# Altium PCB Accessory_Breakout_X1.PcbDoc
Units mm, origin at the board's own origin, x right, y up, seen from the top; angles counter-clockwise.
Board outline 76.36 x 81.86 mm, 2 copper layers (Top Layer, Bottom Layer), stack 1.571 mm thick; 13 components, 26 nets, 122 pads, 412 vias.
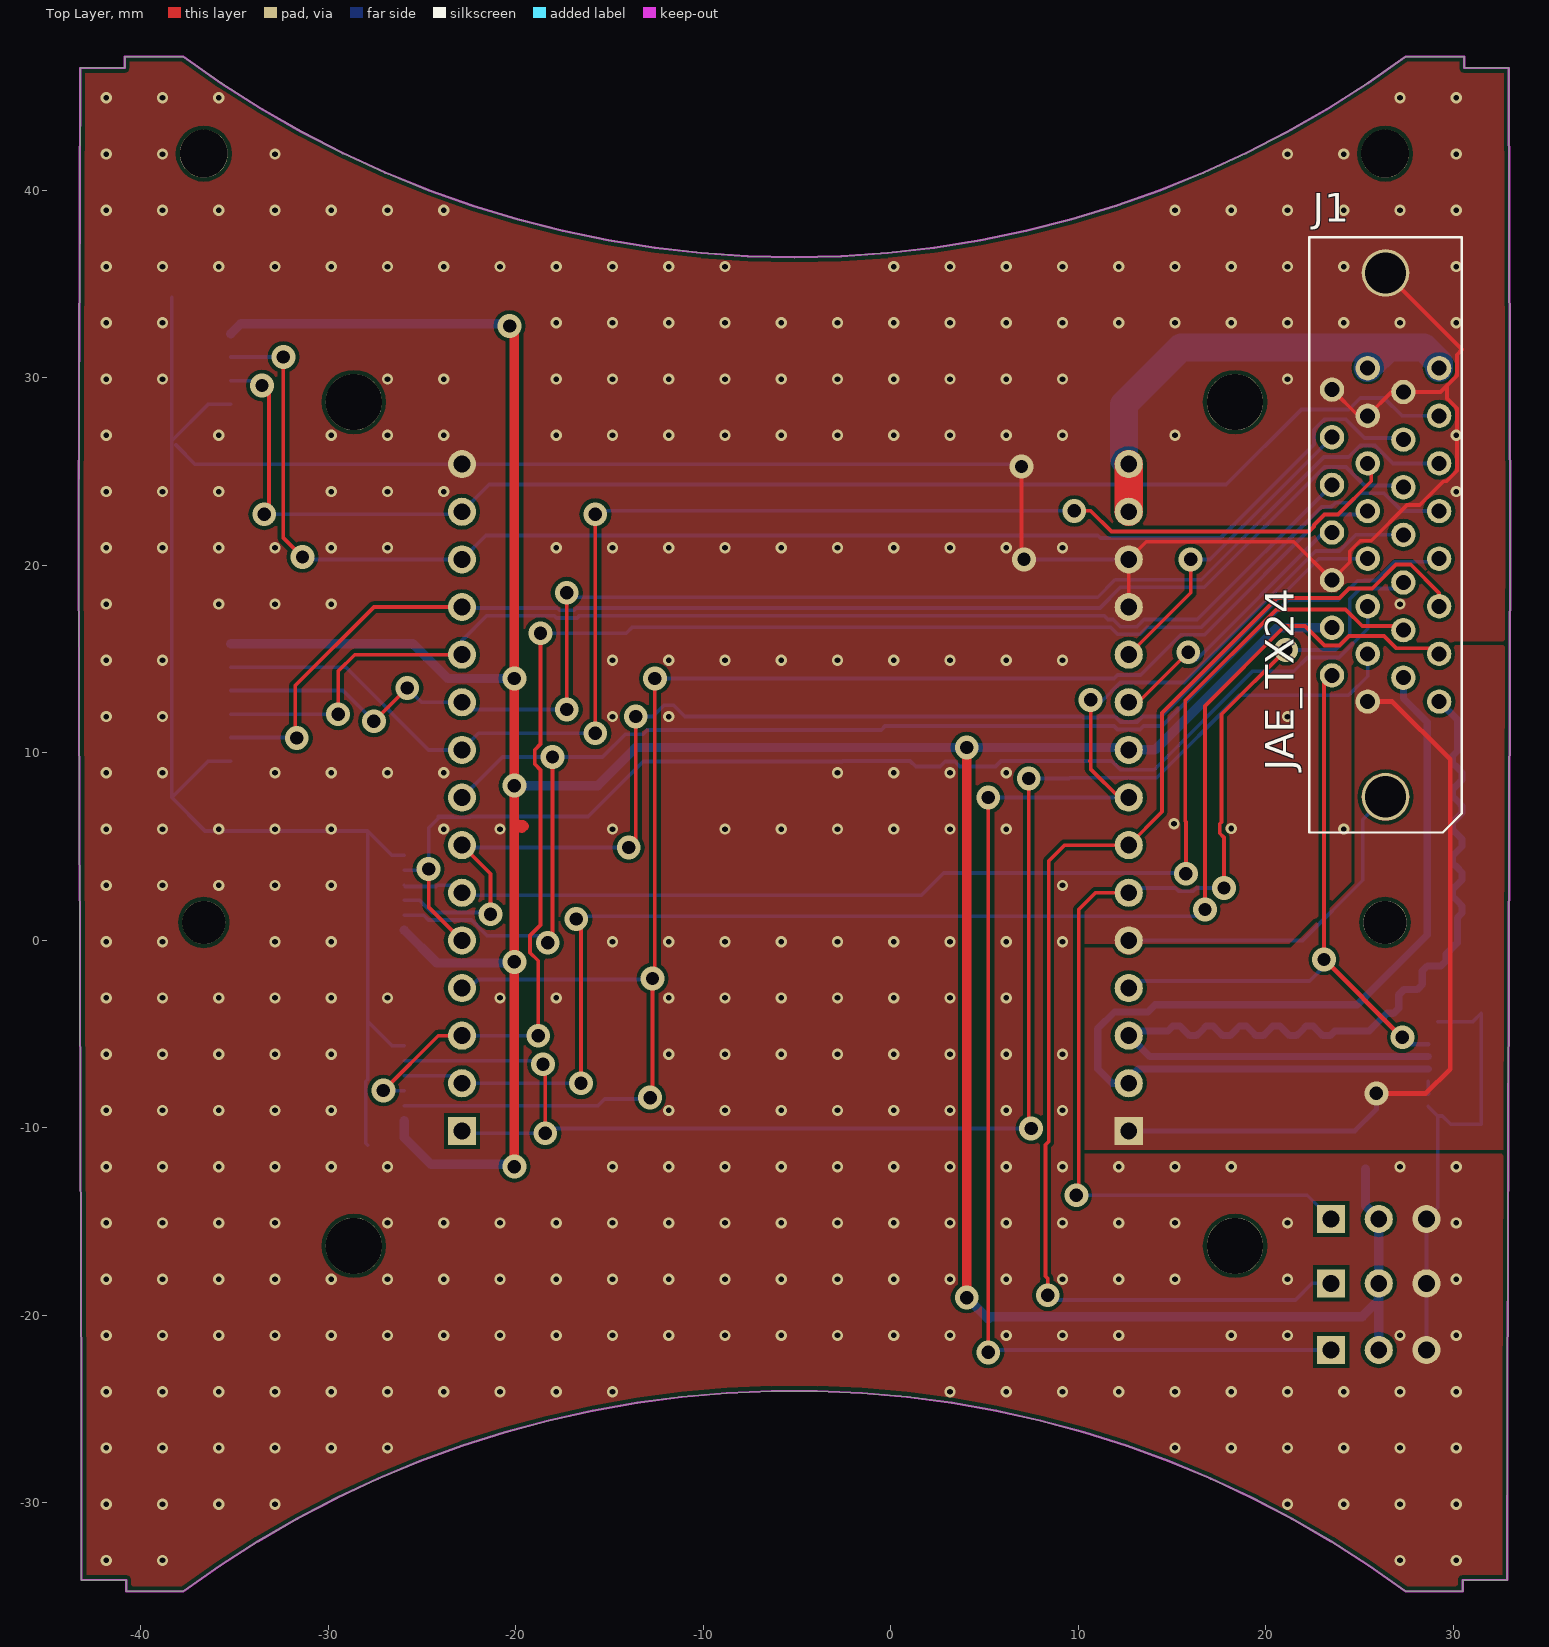
[diagram p0: Top Layer view]
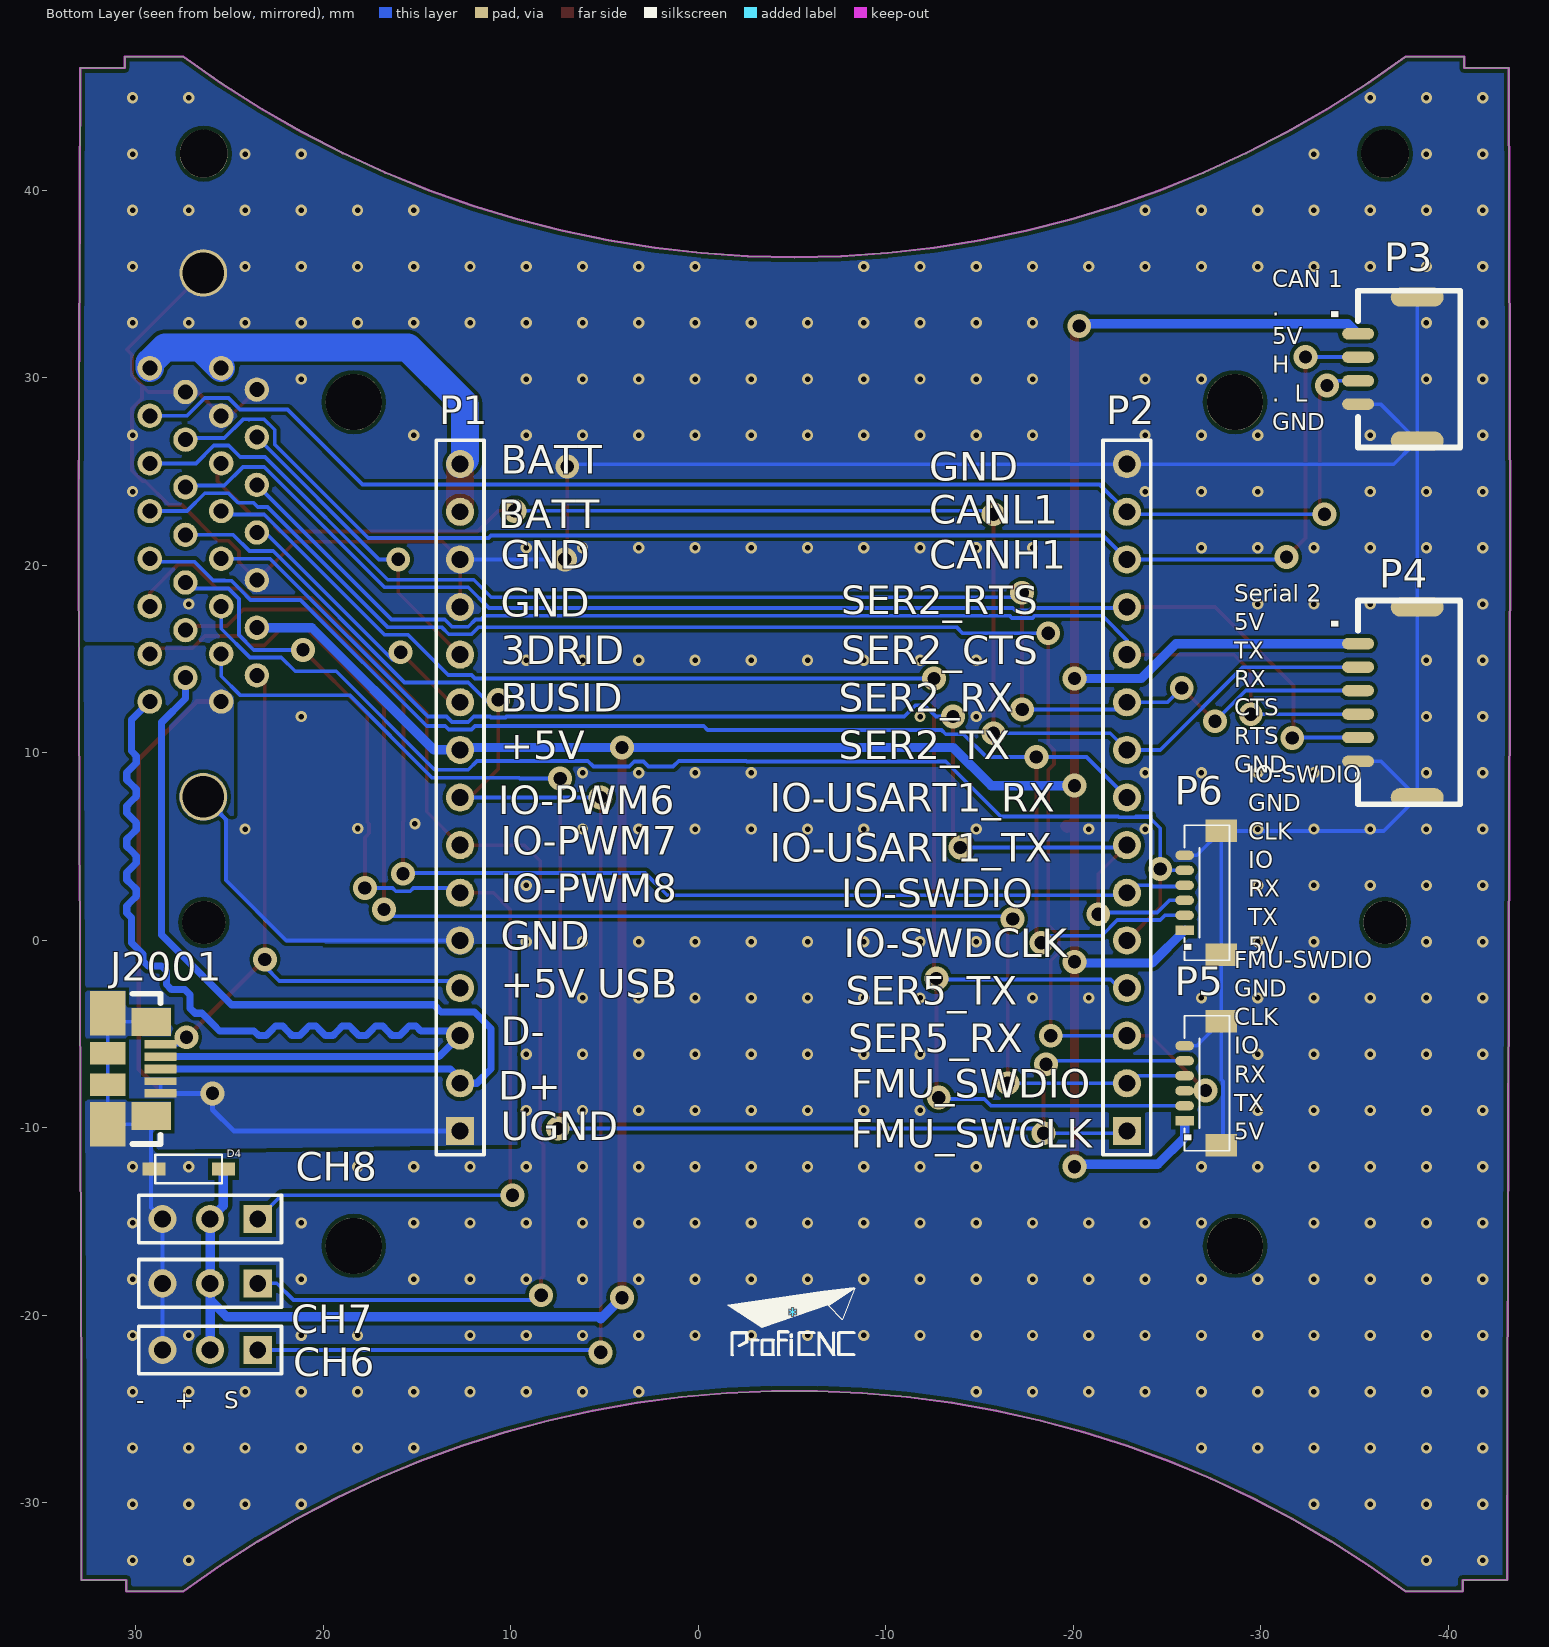
[diagram p1: Bottom Layer view, seen from below]
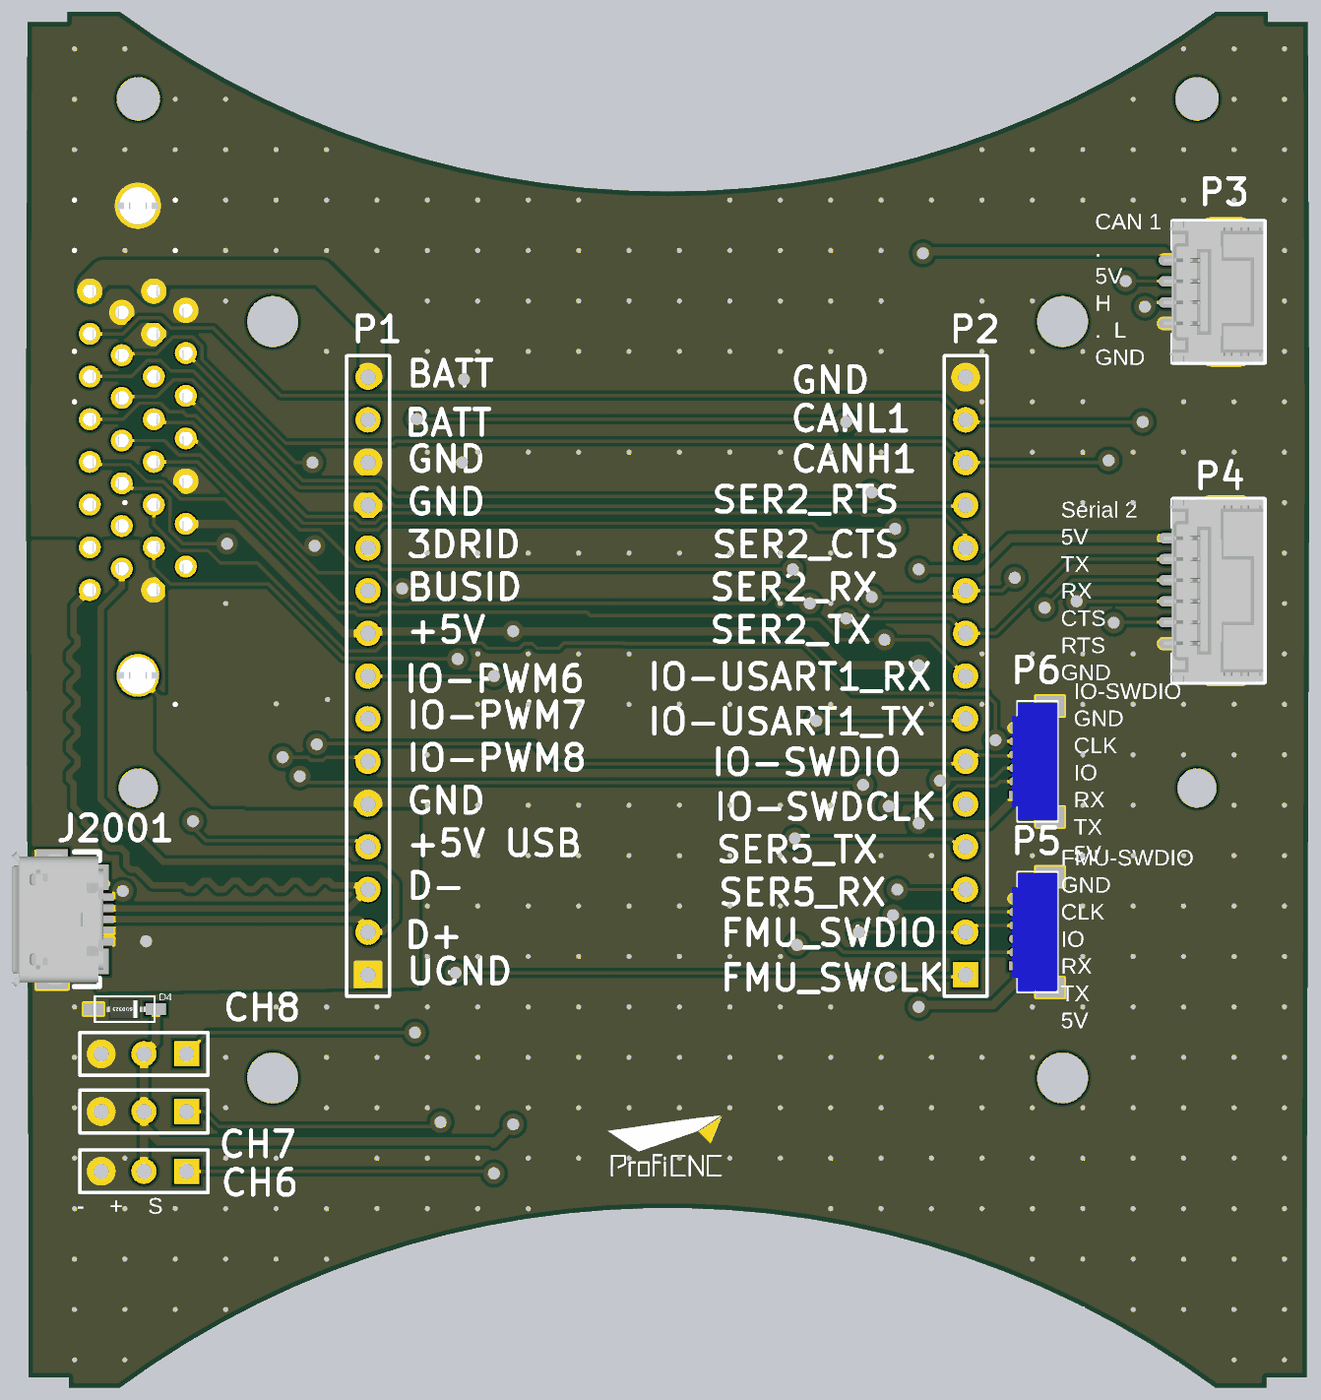
[diagram p2: 3D render of the assembled board from below, using the file's embedded part models]

## Layer stack, top to bottom
Top Layer: signal copper 0.0356
Dielectric: core 1.5, FR-4, Dk 4.2
Bottom Layer: signal copper 0.0356

## Board outline
-40.768,-34.72 -37.732,-34.72 -35.763,-33.337 -33.735,-32.041 -31.653,-30.836 -29.519,-29.722 -27.34,-28.703 -25.117,-27.779 -22.857,-26.955 -20.562,-26.229 -18.238,-25.605 -15.889,-25.083 -13.519,-24.664 -11.134,-24.349 -8.736,-24.139 -6.332,-24.034 -3.926,-24.034 -1.522,-24.139 0.876,-24.349 3.261,-24.664 5.631,-25.083 7.98,-25.605 10.304,-26.229 12.599,-26.955 14.859,-27.779 17.082,-28.703 19.261,-29.722 21.395,-30.836 23.477,-32.041 25.505,-33.337 27.474,-34.72 30.51,-34.72 30.51,-34.11 32.894,-34.11 32.896,-25.039 32.974,-1.783 33.05,21.459 32.966,46.528 30.594,46.528 30.591,47.138 27.474,47.138 25.434,45.707 23.33,44.37 21.168,43.13 18.953,41.988 16.688,40.949 14.378,40.012 12.028,39.182 9.643,38.458 7.228,37.844 4.787,37.339 2.326,36.946 -0.151,36.664 -2.637,36.495 -5.129,36.438 -7.621,36.495 -10.107,36.664 -12.584,36.946 -15.045,37.339 -17.486,37.844 -19.901,38.458 -22.286,39.182 -24.636,40.012 -26.946,40.949 -29.211,41.988 -31.427,43.13 -33.588,44.37 -35.692,45.707 -37.732,47.138 -40.849,47.138 -40.852,46.528 -43.224,46.528 -43.308,21.459 -43.232,-1.783 -43.154,-25.039 -43.152,-34.11 -40.768,-34.11

## Design rules (kind name [scope] priority, off if disabled: settings)
Clearance [All] p1: gap=0.203
DiffPairsRouting [All] p1: maxlimit=0.254 minlimit=0.254 mostfreqgap=0.254 maxuncoupledlength=12.7
HoleSize [All] p1: absolutevalues=TRUE maxlimit=7.62 minlimit=0.025 maxpercent=80.000 minpercent=20.000
MinimumSolderMaskSliver [All] p1 off: minsoldermaskwidth=0.15
PolygonConnect [All] p1: connectstyle=Direct reliefconductorwidth=0.254 reliefentries=4 polygonreliefangle="90 Angle" airgapwidth=0.254
RoutingVias [All] p1: holewidth=0.711 width=1.27 viastyle="Through Hole" minholewidth=0.711 minwidth=1.27 maxholewidth=0.711 maxwidth=1.27
SilkToSilkClearance [All] p1 off: silktosilkclearance=0.254
SilkToSolderMaskClearance [IsPad] p1 off: minsilkscreentomaskgap=0.254 clearancetoexposedcopper=TRUE
SolderMaskExpansion [All] p1: expansion=0.102
Width [All] p1: maxlimit=3 minlimit=0.2 preferedwidth=0.254 minimp=50.000000 maximp=50.000000 favimp=50.000000
23 further rules are at their usual default settings.

## Classes and differential pairs
differential pair D: +D_P -D_N

## Components (designator, comment, footprint, x,y, rotation, side; value= is the part's Value field where it differs from the comment)
* "ProfiCNC_LOGO" ProfiCNC_medium -5.08,-19.939 r180 bottom
CH6 "Header 3" HDR1X3 23.495,-21.844 r0 bottom
CH7 "Header 3" HDR1X3 23.495,-18.288 r0 bottom
CH8 "Header 3" HDR1X3 23.495,-14.859 r0 bottom
D4 "MMSZ5232BT1G" SOD-123 27.178,-12.192 r0 bottom
J1 "JAE_TX24" "JAE TX24" 26.396,7.659 r180 top locked
J2001 "47346-0001" MOLEX-47346-0001 31.496,-6.858 r180 bottom
P1 "Header 15" HDR1X15 12.7,-10.16 r90 bottom
P2 "Header 15" HDR1X15 -22.86,-10.16 r90 bottom
P3 "CLICKMATE_1.25_4" CLICKMATE_V4 -40.64,30.48 r270 bottom
P4 "CLICKMATE_1.25_6" CLICKMATE_V6 -40.64,12.7 r270 bottom
P5 "JST_SUR_6" JST_SUR_H6 -27.94,-7.62 r90 bottom
P6 "JST_SUR_6" JST_SUR_H6 -27.94,2.54 r90 bottom

## Footprints (in the part's own frame and the unit in brackets; to place one, negate y for a bottom-side part, rotate by r counter-clockwise, add the part's x,y. Pads: shape width x height; smd on the part's side, far side on the other; paste and mask are expansions set on the pad)
CLICKMATE_V4 [mil] "5023820470"
  rrect100% 24x67 smd: 1(-73.82,-214.57) 2(-24.61,-214.57) 3(25,-214.57) 4(74,-214.57)
  rrect100% 40x111 smd: GND(-150.59,-90.55) GND(151,-90.55)
  silkscreen extent -164,-215 165,0, body extent -164,-237 164,-3, height 179
CLICKMATE_V6 [mil]
  rrect100% 24x67 smd: 1(-123.03,-214.57) 2(-73.82,-214.57) 3(-24.61,-214.57) 4(25,-214.57) 5(74,-214.57) 6(124,-214.57)
  rrect100% 40x111 smd: GND(-199.8,-90.55) GND(200,-90.55)
  silkscreen extent -214,-215 214,0, body extent -214,-237 214,-3, height 179
HDR1X3 [mm] "Connector; Header; 3 Position"
  rect 1.5x1.5 hole 0.9: 1(0,0)
  round 1.5 hole 0.9: 2(2.54,0) 3(5.08,0)
  silkscreen extent -1.27,-1.27 6.35,1.27
HDR1X15 [mm] "Connector; Header; 15 Position"
  rect 1.5x1.5 hole 0.9: 1(0,0)
  round 1.5 hole 0.9: 2(2.54,0) 3(5.08,0) 4(7.62,0) 5(10.16,0) 6(12.7,0) 7(15.24,0) 8(17.78,0) 9(20.32,0) 10(22.86,0) 11(25.4,0) 12(27.94,0) 13(30.48,0) 14(33.02,0) 15(35.56,0)
  silkscreen extent -1.27,-1.27 36.83,1.27
"JAE TX24" [mm]
  round 1.3 hole 0.8: 1(-2.856,-5.08) 2(-0.953,-6.35) 3(-2.856,-7.62) 4(-0.953,-8.89) 5(-2.856,-10.16) 6(-0.953,-11.43) 7(-2.856,-12.7) 8(-0.953,-13.97) 9(-2.856,-15.24) 10(-0.953,-16.51) 11(-2.856,-17.78) 12(-0.953,-19.05) 13(-2.856,-20.32) 14(-0.953,-21.59) 15(-2.856,-22.86) 16(0.952,-5.08) 17(2.856,-6.477) 18(0.952,-7.62) 19(2.856,-9.017) 20(0.952,-10.16) 21(2.856,-11.557) 22(0.952,-12.7) 23(2.856,-14.097) 24(0.952,-15.24) 25(2.856,-16.637) 26(0.952,-17.78) 27(2.856,-19.177) 28(0.952,-20.32) 29(2.856,-21.717) 30(0.952,-22.86)
  round 2.54 hole 2.2: TAB(0,0) TAB(0,-27.94)
  silkscreen extent -4.06,-29.84 4.06,1.91, body extent -4,-29.82 4,1.88, height 10.3
JST_SUR_H6 [mm]
  rect 0.5x1 smd: 1(-2,2)
  rrect100% 0.5x1 smd: 2(-1.2,2) 3(-0.4,2) 4(0.4,2) 5(1.2,2) 6(2,2)
  rect 1.2x1.7 smd: GND(-3.3,0.05) GND(3.3,0.05)
  silkscreen extent -3.6,-0.4 3.6,2, body extent -3.5,-0.4 3.5,2.3, height 1.7
MOLEX-47346-0001 [mil]
  rect 67x18 smd: D+(111,0) D-(111,26) GND(111,-51.18) VBUS(111,52)
  rect 75x94 smd: GND1(0,117) GND4(0,-116.14)
  rect 83x59 smd: GND2(91,99) GND3(91,-98.43)
  rect 75x47 smd: GND5(0,-32.97) GND6(0,33)
  rect 67x15.75 smd: ID(111,-25.59)
  silkscreen extent 52,-157 111,158, body extent -94,-157 120,157, height 107
ProfiCNC_medium [mm] "ProfiCNC_medium"
  silkscreen extent -3.5,-2.23 3.28,1.41
SOD-123 [mil] "SOD-123"
  rect 48x28 smd: A(73,0) C(-72.83,0)
  silkscreen extent -70,-30 70,30, body extent -49,-24 49,25, height 35

## Part data
CH6 CH7 CH8: "Header, 3-Pin"
D4: library part DIODESOD-123, "DIODE ZENER 5.6V 500MW SOD123"
J2001: library part MOLEX-47346-0001, "MICRO USB B, BOTTOM MOUNT"
P1 P2: "Header, 15-Pin"
P3: "Connector, Rcpt, 4Pos, 1.25MM, W/B, VERT, SMD, Tin"
P4: "Connector, Rcpt, 6Pos, 1.25MM, W/B, VERT, SMD, Tin"
P5 P6: "Connector, Header, 6Pos, .8mm IDC, R/A, SMD, Tin"

## Free pads (board coordinates)
  round 2.305 hole 2.305: 1(-36.629,0.959) 1(26.371,0.959)
  round 2.555 hole 2.555: 1(-36.629,41.959) 1(26.371,41.959)
  round 3 hole 3: 1(-28.629,-16.291) 1(-28.629,28.709) 1(18.371,-16.291) 1(18.371,28.709)

## Via types
v1: diameter 0.6, hole 0.3, Top Layer to Bottom Layer, tented both sides, 358 vias
v2: diameter 1.27, hole 0.711, Top Layer to Bottom Layer, tented both sides, 54 vias

## Nets (pads, with @x,y where several pads share a name; then routed paths per layer and width w, separated by ;. In a path a pad name is that pad's centre, name@x,y a point inside that pad or via, vN(x,y) a via of type N, cw(c..) or ccw(c..) an arc to the next point about the centre after c; other vN are vias at no path point)
3DRID: J1.27 P1.11 | length 16.7
  Top Layer w0.2: P1.11 16.002,18.542 v2(16.002,20.32)
  Bottom Layer w0.2: v2(16.002,20.32) 17.024,20.32 J1.27
+5V: CH6.2 CH7.2 CH8.2 D4.C J1.19 P1.9 P3.1 P4.1 P5.1 P6.1 | length 201.9
  Top Layer w0.5: v2(-20.32,32.766) -20.066,32.512 v2(-20.066,13.97) v2(-20.066,-1.143) v2(-20.066,-12.065) -20.066,-11.049 ; -20.066,6.168 -19.615,6.168 -19.543,6.096 -19.67,5.969 -20.066,6.365 ; v2(4.064,-19.05) v2(4.064,10.287)
  Bottom Layer w0.5: P4.1 -25.477,15.825 -23.622,13.97 v2(-20.066,13.97) ; P3.1 -34.652,32.893 -20.447,32.893 v2(-20.32,32.766) ; P5.1 -25.94,-10.509 -24.511,-11.938 -19.939,-11.938 v2(-20.066,-12.065) ; P6.1 -24.197,-1.203 -20.006,-1.203 v2(-20.066,-1.143) ; v2(-20.066,8.255) -15.621,8.255 -13.589,10.287 v2(4.064,10.287) 12.573,10.287 P1.9 14.097,10.16 20.613,16.676 J1.19 ; v2(4.064,-19.05) 5.207,-20.193 5.207,-20.066 25.146,-20.066 26.035,-19.177 ; D4.C 25.328,-14.152 CH8.2 26.035,-19.177 ; CH6.2@26.035,-21.59 26.035,-19.177
+5V_USB: J1.17 J2001.VBUS P1.4 | length 34.3
  Top Layer w0.2: v2(23.114,-1.016) 23.114,13.71 J1.17
  Top Layer w0.254: v2(23.114,-1.016) 27.267,-5.169 v2(27.292,-5.169)
  Bottom Layer w0.2: P1.4 12.7,-2.159 22.352,-2.159 23.114,-1.397 v2(23.114,-1.016)
  Bottom Layer w0.254: v2(27.292,-5.169) 27.661,-5.537 J2001.VBUS
BATT: J1.15 J1.30 P1.14 P1.15 | length 26.1
  Top Layer w1.5: P1.14 P1.15
  Bottom Layer w1.5: P1.15 12.446,25.654 12.446,28.575 15.494,31.623 26.548,31.623 ; J1.30 26.548,31.623 ; J1.15 29.252,30.819 28.448,31.623 26.548,31.623
"BUS ID": J1.23 P1.10 | length 15.2
  Top Layer w0.2: P1.10 13.208,12.7 v2(15.875,15.367)
  Bottom Layer w0.2: v2(15.875,15.367) 15.875,14.986 16.323,14.986 23.093,21.756 J1.23 J1.23@23.54,21.776
CANH1: J1.12 P2.13 P3.2 | length 76.9
  Top Layer w0.2: v2(-32.385,31.115) -32.385,21.463 v2(-31.369,20.447)
  Bottom Layer w0.2: P3.2@-35.18,31.115 v2(-32.385,31.115) ; v2(-31.369,20.447) -31.369,20.32 P2.13 -21.59,21.59 11.049,21.59 11.176,21.463 17.597,21.463 22.587,26.453 22.587,27.231 23.145,27.789 23.935,27.789 23.957,27.767 23.979,27.789 24.286,27.789 25.28,26.795 27.349,26.795 J1.12
CANL1: J1.13 P2.14 P3.3 | length 74.7
  Top Layer w0.2: v2(-33.528,29.591) -33.147,29.21 -33.147,22.987 v2(-33.401,22.733)
  Bottom Layer w0.2: P3.3 -33.528,29.845 v2(-33.528,29.591) ; v2(-33.401,22.733) -22.987,22.733 P2.14 -21.404,24.316 17.904,24.316 21.909,28.321 24.438,28.321 25.049,28.932 26.318,28.932 27.271,27.979 J1.13
D_N: J1.1 J2001.D- P1.3 | length 54.4
  Bottom Layer w0.381: P1.3 13.818,-6.198 J2001.D- ; P1.3@12.7,-4.826 14.351,-4.826 14.795,-4.826 15.05,-4.572 15.43,-4.572 15.684,-4.826 15.939,-5.08 16.319,-5.08 16.573,-4.826 16.828,-4.572 17.208,-4.572 17.462,-4.826 17.717,-5.08 18.097,-5.08 18.351,-4.826 18.606,-4.572 18.986,-4.572 19.241,-4.826 19.495,-5.08 19.875,-5.08 20.13,-4.826 20.384,-4.572 20.764,-4.572 21.018,-4.826 21.273,-5.08 21.653,-5.08 21.907,-4.826 22.162,-4.572 22.542,-4.572 22.796,-4.826 23.051,-5.08 23.431,-5.08 23.685,-4.826 24.511,-4.826 25.527,-4.826 25.841,-4.512 26.47,-3.883 26.829,-3.883 27.099,-3.614 27.099,-3.254 27.099,-2.895 27.368,-2.626 27.727,-2.626 28.086,-2.626 28.356,-2.356 28.356,-1.997 28.356,-1.638 28.625,-1.369 28.984,-1.369 29.344,-1.369 29.613,-1.099 29.613,-0.74 30.226,-0.127 30.226,0.318 30.226,1.206 30.48,1.461 30.48,1.841 30.226,2.095 29.972,2.35 29.972,2.73 30.226,2.984 30.48,3.239 30.48,3.619 30.226,3.873 29.972,4.128 29.972,4.508 30.226,4.763 30.48,5.017 30.48,5.397 30.226,5.652 29.972,5.906 29.972,6.286 30.226,6.541 30.48,6.795 30.48,7.175 30.226,7.43 29.972,7.684 29.972,8.064 30.226,8.319 30.48,8.573 30.48,8.953 30.226,9.208 29.972,9.462 29.972,9.842 30.226,10.097 30.226,10.287 30.226,11.765 J1.1
D_P: J1.2 J2001.D+ P1.2 | length 54.4
  Bottom Layer w0.381: J1.2 27.349,12.901 28.617,11.633 28.617,0.296 24.892,-3.429 14.097,-3.429 13.716,-3.81 11.938,-3.81 11.049,-4.699 11.049,-6.858 11.811,-7.62 P1.2 12.7,-7.366 13.208,-6.858 J2001.D+
FMU-SWCLK: J1.18 P2.1 P5.5 | length 82.2
  Top Layer w0.2: v2(-18.542,-6.604) -18.542,-7.09 -18.415,-7.217 v2(-18.415,-10.287) ; v2(7.366,8.636) 7.366,-9.906 v2(7.493,-10.033)
  Bottom Layer w0.2: P5.5 -18.485,-6.42 -18.485,-6.547 v2(-18.542,-6.604) ; P2.1 -22.733,-10.287 v2(-18.415,-10.287) -18.161,-10.033 v2(7.493,-10.033) ; v2(7.366,8.636) 9.525,8.636 9.562,8.673 14.196,8.673 18.604,13.081 24.438,13.081 25.444,14.087 J1.18
FMU-SWDIO: J1.3 P2.2 P5.4 | length 78.4
  Top Layer w0.2: v2(-16.764,1.143) -16.51,1.143 v2(-16.51,-7.62) ; v2(16.764,1.651) 16.764,12.503 21.025,16.764 22.104,16.764 23.145,15.723 23.935,15.723 24.444,16.232 26.313,16.232 26.957,15.588 28.943,15.588 J1.3
  Bottom Layer w0.2: P5.4 -23.26,-7.22 P2.2 v2(-16.51,-7.62) ; v2@-16.764,1.295 16.408,1.295 v2(16.764,1.651)
GND: CH6.3 CH7.3 CH8.3 D4.A J1.14 J1.21 J1.28 J1.29 J1.TAB J2001.GND1 J2001.GND2 J2001.GND3 J2001.GND4 P1.5 P1.12 P1.13 P2.15 P3.4 P3.GND P4.6 P4.GND P5.6 P5.GND P6.6 P6.GND | length 211
  Top Layer w0.2: v2(6.985,25.273) 6.985,20.447 v2(7.112,20.32) ; P1.12 P1.13 13.638,21.258 21.498,21.258 J1.21 24.491,20.167 24.491,20.754 25.049,21.312 25.636,21.312 27.54,23.216 28.221,23.216 29.491,24.486 29.647,24.486 30.205,25.044 30.205,28.374 29.672,28.907 29.672,29.591 ; J1.29 J1.28@24.937,27.979 ; J1.28 26.714,29.249 J1.14 29.33,29.249 29.672,29.591 ; J1.TAB@26.396,35.599 30.48,31.515 30.205,31.24 30.205,30.124 29.672,29.591
  Bottom Layer w0.2: P3.GND@-38.34,26.645 P3.GND@-38.34,34.305 ; P3.GND@-38.111,26.416 -37.095,25.4 P2.15 6.858,25.4 v2(6.985,25.273) ; P4.6 -36.41,9.55 P4.GND@-38.34,7.62 ; P3.4 -36.384,28.6 -38.34,26.645 -38.34,17.775 P4.GND@-38.34,7.62 ; P5.GND@-27.89,-10.92 -27.989,-10.821 -27.989,-7.513 -27.89,-7.414 P5.GND@-27.89,-4.32 ; P5.6 -26.59,-5.62 P5.GND@-27.89,-4.32 ; P6.6 -26.59,4.54 P6.GND@-27.89,5.84 ; v2(7.112,20.32) P1.13 ; P1.5 21.971,0 25.18,3.209 25.18,6.443 J1.TAB@26.396,7.659 ; J1.28@24.937,27.979 J1.28 ; CH6.3 CH7.3 CH8.3@28.575,-14.986 ; CH8.3 29.185,-14.249 J2001.GND3 ; J2001.GND3@28.677,-8.85 J2001.GND3 ; J2001.GND2 31.039,-4.343 J2001.GND1 J2001.GND4 29.874,-9.808 29.424,-9.358 J2001.GND3 ; P4.GND@-38.34,7.62 -36.56,5.84 P6.GND@-27.89,5.84 ; P5.GND@-27.89,-4.32 -27.89,-0.76 P6.GND@-27.89,5.84
  other v1: -41.832,-33.064 -38.832,-33.064 27.168,-33.064 30.168,-33.064 -41.832,-30.064 -38.832,-30.064 -35.832,-30.064 -32.832,-30.064 21.168,-30.064 24.168,-30.064 27.168,-30.064 30.168,-30.064 -41.832,-27.064 -38.832,-27.064 -35.832,-27.064 -32.832,-27.064 -29.832,-27.064 -26.832,-27.064 15.168,-27.064 18.168,-27.064 21.168,-27.064 24.168,-27.064 27.168,-27.064 30.168,-27.064 -41.832,-24.064 -38.832,-24.064 -35.832,-24.064 -32.832,-24.064 -29.832,-24.064 -26.832,-24.064 -23.832,-24.064 -20.832,-24.064 -17.832,-24.064 -14.832,-24.064 3.168,-24.064 6.168,-24.064 9.168,-24.064 12.168,-24.064 15.168,-24.064 18.168,-24.064 21.168,-24.064 24.168,-24.064 27.168,-24.064 30.168,-24.064 -41.832,-21.064 -38.832,-21.064 -35.832,-21.064 -32.832,-21.064 -29.832,-21.064 -26.832,-21.064 -23.832,-21.064 -20.832,-21.064 -17.832,-21.064 -14.832,-21.064 -11.832,-21.064 -8.832,-21.064 -5.832,-21.064 -2.832,-21.064 0.168,-21.064 3.168,-21.064 6.168,-21.064 9.168,-21.064 12.168,-21.064 18.168,-21.064 21.168,-21.064 27.168,-21.064 30.168,-21.064 -41.832,-18.064 -38.832,-18.064 -35.832,-18.064 -32.832,-18.064 -29.832,-18.064 -26.832,-18.064 -23.832,-18.064 -20.832,-18.064 -17.832,-18.064 -14.832,-18.064 -11.832,-18.064 -8.832,-18.064 -5.832,-18.064 -2.832,-18.064 0.168,-18.064 3.168,-18.064 6.168,-18.064 9.168,-18.064 12.168,-18.064 15.168,-18.064 21.168,-18.064 30.168,-18.064 -41.832,-15.064 -38.832,-15.064 -35.832,-15.064 -32.832,-15.064 -26.832,-15.064 -23.832,-15.064 -20.832,-15.064 -17.832,-15.064 -14.832,-15.064 -11.832,-15.064 -8.832,-15.064 -5.832,-15.064 -2.832,-15.064 0.168,-15.064 3.168,-15.064 6.168,-15.064 9.168,-15.064 12.168,-15.064 15.168,-15.064 21.168,-15.064 30.168,-15.064 -41.832,-12.064 -38.832,-12.064 -35.832,-12.064 -32.832,-12.064 -29.832,-12.064 -26.832,-12.064 -14.832,-12.064 -11.832,-12.064 -8.832,-12.064 -5.832,-12.064 -2.832,-12.064 0.168,-12.064 3.168,-12.064 6.168,-12.064 9.168,-12.064 12.168,-12.064 15.168,-12.064 18.168,-12.064 27.168,-12.064 30.168,-12.064 -41.832,-9.064 -38.832,-9.064 -35.832,-9.064 -32.832,-9.064 -29.832,-9.064 -11.832,-9.064 -8.832,-9.064 -5.832,-9.064 -2.832,-9.064 0.168,-9.064 3.168,-9.064 6.168,-9.064 9.168,-9.064 -41.832,-6.064 -38.832,-6.064 -35.832,-6.064 -32.832,-6.064 -29.832,-6.064 -11.832,-6.064 -8.832,-6.064 -5.832,-6.064 -2.832,-6.064 0.168,-6.064 3.168,-6.064 6.168,-6.064 9.168,-6.064 -41.832,-3.064 -38.832,-3.064 -35.832,-3.064 -32.832,-3.064 -29.832,-3.064 -26.832,-3.064 -20.832,-3.064 -17.832,-3.064 -11.832,-3.064 -8.832,-3.064 -5.832,-3.064 -2.832,-3.064 0.168,-3.064 3.168,-3.064 6.168,-3.064 -41.832,-0.064 -38.832,-0.064 -32.832,-0.064 -29.832,-0.064 -14.832,-0.064 -11.832,-0.064 -8.832,-0.064 -5.832,-0.064 -2.832,-0.064 0.168,-0.064 3.168,-0.064 6.168,-0.064 9.168,-0.064 -41.832,2.936 -38.832,2.936 -35.832,2.936 -32.832,2.936 -29.832,2.936 9.168,2.936 -41.832,5.936 -38.832,5.936 -35.832,5.936 -32.832,5.936 -29.832,5.936 -23.832,5.936 -20.832,5.936 -14.832,5.936 -8.832,5.936 -5.832,5.936 -2.832,5.936 0.168,5.936 3.168,5.936 6.168,5.936 24.168,5.936 18.161,5.969 15.113,6.223 -41.832,8.936 -38.832,8.936 -32.832,8.936 -29.832,8.936 -26.832,8.936 -23.832,8.936 -2.832,8.936 0.168,8.936 3.168,8.936 6.168,8.936 -41.832,11.936 -38.832,11.936 -14.832,11.936 -11.832,11.936 21.168,11.936 -41.832,14.936 -38.832,14.936 -14.832,14.936 -11.832,14.936 -8.832,14.936 -5.832,14.936 -2.832,14.936 0.168,14.936 3.168,14.936 6.168,14.936 9.168,14.936 -41.832,17.936 -35.832,17.936 -32.832,17.936 -29.832,17.936 27.168,17.936 -41.832,20.936 -38.832,20.936 -35.832,20.936 -32.832,20.936 -29.832,20.936 -26.832,20.936 -17.832,20.936 -14.832,20.936 -11.832,20.936 -8.832,20.936 -5.832,20.936 -2.832,20.936 0.168,20.936 3.168,20.936 6.168,20.936 9.168,20.936 -41.832,23.936 -38.832,23.936 -35.832,23.936 -29.832,23.936 -26.832,23.936 -23.832,23.936 30.168,23.936 -41.832,26.936 -35.832,26.936 -29.832,26.936 -26.832,26.936 -23.832,26.936 -17.832,26.936 -14.832,26.936 -11.832,26.936 -8.832,26.936 -5.832,26.936 -2.832,26.936 0.168,26.936 3.168,26.936 6.168,26.936 9.168,26.936 15.168,26.936 30.168,26.936 -41.832,29.936 -38.832,29.936 -26.832,29.936 -23.832,29.936 -17.832,29.936 -14.832,29.936 -11.832,29.936 -8.832,29.936 -5.832,29.936 -2.832,29.936 0.168,29.936 3.168,29.936 6.168,29.936 9.168,29.936 21.168,29.936 -41.832,32.936 -38.832,32.936 -17.832,32.936 -14.832,32.936 -11.832,32.936 -8.832,32.936 -5.832,32.936 -2.832,32.936 0.168,32.936 3.168,32.936 6.168,32.936 9.168,32.936 12.168,32.936 15.168,32.936 18.168,32.936 21.168,32.936 24.168,32.936 27.168,32.936 30.168,32.936 -41.832,35.936 -38.832,35.936 -35.832,35.936 -32.832,35.936 -29.832,35.936 -26.832,35.936 -23.832,35.936 -20.832,35.936 -17.832,35.936 -14.832,35.936 -11.832,35.936 -8.832,35.936 0.168,35.936 3.168,35.936 6.168,35.936 9.168,35.936 12.168,35.936 15.168,35.936 18.168,35.936 21.168,35.936 24.168,35.936 30.168,35.936 -41.832,38.936 -38.832,38.936 -35.832,38.936 -32.832,38.936 -29.832,38.936 -26.832,38.936 -23.832,38.936 15.168,38.936 18.168,38.936 21.168,38.936 24.168,38.936 27.168,38.936 30.168,38.936 -41.832,41.936 -38.832,41.936 -32.832,41.936 21.168,41.936 24.168,41.936 30.168,41.936 -41.832,44.936 -38.832,44.936 -35.832,44.936 27.168,44.936 30.168,44.936
IO-PWM6: CH6.1 J1.8 P1.8 | length 82.5
  Top Layer w0.2: v2(5.207,-21.971) v2(5.207,7.62) ; 10.633,9.574 10.668,9.539 ; v2(10.668,12.827) 10.668,9.144 12.192,7.62 P1.8
  Bottom Layer w0.2: v2(5.207,-21.971) 5.334,-21.844 CH6.1 CH6.1@23.749,-21.844 ; v2(5.207,7.62) P1.8 ; v2(10.668,12.827) 11.084,12.827 11.211,12.7 12.264,13.753 15.661,13.753 22.67,20.762 23.937,20.762 24.804,21.629 J1.8
IO-PWM7: CH7.1 J1.5 P1.7 | length 70.7
  Top Layer w0.2: v2(8.382,-18.923) 8.382,-18.034 8.255,-17.907 8.255,-10.901 8.431,-10.725 8.431,4.24 9.271,5.08 P1.7 14.478,6.858 14.478,12.127 20.614,18.263 23.935,18.263 24.444,18.772 25.684,18.772 26.954,20.042 27.744,20.042 29.252,18.534 J1.5
  Bottom Layer w0.2: v2(8.382,-18.923) 8.636,-19.177 21.59,-19.177 22.479,-18.288 CH7.1
IO-PWM8: CH8.1 J1.6 P1.6 | length 61.1
  Top Layer w0.2: v2(9.906,-13.589) 10.033,-13.589 10.033,1.651 10.922,2.54 P1.6 ; v2(17.78,2.794) 17.78,5.497 17.558,5.719 17.558,6.219 17.653,6.314 17.653,12.065 v2(21.082,15.494)
  Bottom Layer w0.2: v2(9.906,-13.589) 22.225,-13.589 CH8.1 ; P1.6 12.7,2.794 15.183,2.794 15.359,2.618 16.137,2.618 16.313,2.794 v2(17.78,2.794) ; v2(21.082,15.494) 23.706,15.494 24.493,16.281 24.493,17.071 24.491,17.073 24.491,18.214 25.049,18.772 27.032,18.772 J1.6
IO-SWCLK: J1.20 P2.5 P6.5 | length 65.4
  Top Layer w0.2: v2(-24.638,3.81) -24.638,1.778 P2.5
  Bottom Layer w0.2: P6.5 -24.708,3.74 v2(-24.638,3.81) -24.638,5.983 -24.054,6.567 -23.296,6.567 ; -24.13,6.604 -23.333,6.604 -23.296,6.567 ; J1.20 25.444,16.627 23.906,15.089 22.235,15.089 21.497,14.351 19.304,14.351 14.06,9.107 12.264,9.107 11.796,9.574 5.891,9.574 5.588,9.271 3.686,9.271 3.418,9.539 2.918,9.539 2.65,9.271 1.342,9.271 1.039,9.574 -2.547,9.574 -2.582,9.539 -13.194,9.539 -16.129,6.604 -22.387,6.604 -22.424,6.567 -23.296,6.567
IO-SWDIO: J1.4 P2.6 P6.4 | length 65.8
  Top Layer w0.2: v2(15.748,3.556) 15.748,6.318 15.716,6.35 15.716,12.795 20.574,17.653 24.262,17.653 25.151,16.764 27.134,16.764 J1.4
  Bottom Layer w0.2: P6.4 -25.872,2.872 -24.249,2.872 -24.181,2.94 -23.26,2.94 P2.6 -22.733,2.413 1.651,2.413 2.837,3.599 2.844,3.593 15.711,3.593 v2(15.748,3.556)
"IO-USART1 RX": J1.22 P2.7 P6.3 | length 68.8
  Top Layer w0.2: P2.7 -21.336,3.556 v2(-21.336,1.397) ; v2(-13.97,4.953) -13.589,5.334 v2(-13.589,11.938)
  Bottom Layer w0.2: P6.3 -25.127,2.14 -24.474,1.487 -21.246,1.487 v2(-21.336,1.397) ; P2.7@-22.873,5.093 P2.7 -22.733,4.953 v2(-13.97,4.953) ; v2(-13.589,11.938) -12.683,11.938 -12.082,12.539 -11.582,12.539 -10.981,11.938 10.23,11.938 10.279,11.889 11.057,11.889 11.106,11.938 11.973,11.938 12.264,11.647 13.136,11.647 13.427,11.938 14.416,11.938 22.837,20.359 J1.22
"IO-USART1 TX": J1.7 P2.8 P6.2 | length 75.8
  Top Layer w0.2: v2(-18.288,-0.127) -18.034,0.127 v2(-18.034,9.779)
  Bottom Layer w0.2: P6.2 -24.897,1.34 -24.641,1.084 -22.349,1.084 -21.52,0.254 -18.669,0.254 v2(-18.288,-0.127) ; P2.8 -20.701,9.779 v2(-18.034,9.779) -15.367,9.779 -14.146,11 -13.2,11 -12.975,11.225 -0.5,11.225 -0.296,11.43 11.91,11.43 12.097,11.244 13.303,11.244 13.49,11.43 14.478,11.43 21.209,18.161 23.876,18.161 24.088,18.373 24.088,18.381 24.882,19.175 25.232,19.175 25.256,19.199 25.869,19.199 26.863,20.193 29.086,20.193 J1.7
SER2CT: J1.25 P2.11 P4.4 | length 66.2
  Top Layer w0.2: v2(-29.464,12.065) -29.464,14.351 -28.575,15.24 P2.11
  Bottom Layer w0.2: P4.4 v2(-29.464,12.065) ; P2.11 -22.86,16.002 -21.541,17.321 -17.948,17.321 -17.828,17.201 -16.716,17.201 -16.596,17.321 11.381,17.321 11.59,17.112 11.879,17.112 12.264,16.727 13.136,16.727 13.521,17.112 16.356,17.112 J1.25
SER2RT: J1.10 P2.12 P4.5 | length 71
  Top Layer w0.2: v2(-31.674,10.795) -31.75,10.795 -31.75,13.589 -27.559,17.78 P2.12
  Bottom Layer w0.2: P4.5 -31.648,10.82 v2(-31.674,10.795) ; P2.12 -22.811,17.731 -17.788,17.731 -17.661,17.604 -16.883,17.604 -16.756,17.731 11.161,17.731 12.264,18.833 16.729,18.833 23.145,25.249 24.286,25.249 25.28,24.255 27.349,24.255 J1.10
SER2RX: J1.11 P2.10 P4.3 | length 76.4
  Top Layer w0.2: v2(-27.559,11.684) v2(-25.781,13.462) ; v2(-17.272,12.319) v2(-17.272,18.542)
  Bottom Layer w0.2: P4.3 -29.2,13.325 v2(-27.559,11.684) ; v2(-25.781,13.462) -25.019,12.7 P2.10 -22.479,12.319 v2(-17.272,12.319) ; v2(-17.272,18.542) -17.035,18.305 11.044,18.305 11.975,19.236 16.562,19.236 23.107,25.781 24.43,25.781 25.042,26.392 25.839,26.392 26.792,25.439 J1.11
SER2TX: J1.26 P2.9 P4.2 | length 77.5
  Top Layer w0.2: v2(-15.748,11.049) v2(-15.748,22.733) ; v2(9.792,22.909) 10.678,22.909 11.781,21.807 22.315,21.807 22.587,22.079 22.587,22.151 23.145,22.709 23.86,22.709 25.636,24.486 J1.26@25.636,25.631
  Bottom Layer w0.2: P4.2 -29.053,14.575 -24.638,10.16 P2.9 -21.971,11.049 v2(-15.748,11.049) ; v2(-15.748,22.733) -15.572,22.909 v2(9.792,22.909)
SER5RX: J1.9 P2.3 P5.3 | length 84.4
  Top Layer w0.2: v2(-27.051,-8.001) -24.13,-5.08 P2.3 ; v2(-18.796,-5.08) -18.796,-1.086 -19.226,-0.656 -19.226,0.262 -18.669,0.819 -18.669,9.087 -18.972,9.39 -18.972,10.168 -18.669,10.471 v2(-18.669,16.383)
  Bottom Layer w0.2: v2(-27.051,-8.001) -27.032,-8.02 P5.3 ; P2.3 v2(-18.796,-5.08) ; v2(-18.669,16.383) -14.097,16.383 -13.772,16.708 11.712,16.708 12.097,16.324 13.303,16.324 13.688,16.708 16.574,16.708 22.978,23.112 23.493,23.112 23.724,23.343 24.54,23.343 25.049,23.852 26.318,23.852 27.271,22.899 J1.9
SER5TX: J1.24 P2.4 P5.2 | length 88.3
  Top Layer w0.2: v2(-12.827,-8.382) -12.7,-8.255 v2(-12.7,-2.032) ; v2@-12.749,-2.081 -12.573,-1.905 v2(-12.573,13.97)
  Bottom Layer w0.2: P5.2 -15.608,-8.82 -15.249,-8.461 -12.748,-8.461 v2(-12.827,-8.382) ; P2.4@-22.86,-2.943 -21.998,-2.081 -12.749,-2.081 v2(-12.7,-2.032) ; v2(-12.573,13.97) 11.91,13.97 12.097,14.156 13.338,14.156 15.486,16.305 16.741,16.305 23.145,22.709 25.444,22.709 J1.24
UGND: J1.16 J2001.GND J2001.ID P1.1 | length 44.6
  Top Layer w0.254: J1.16 26.758,12.739 29.845,9.652 29.845,-6.858 28.545,-8.158 v2(25.908,-8.158)
  Bottom Layer w0.2: J2001.GND J2001.ID
  Bottom Layer w0.254: P1.1 24.765,-10.16 25.908,-9.017 v2(25.908,-8.158) J2001.GND
pads on no net: J2001.GND5 J2001.GND6

## Polygon pours and split planes (outlines as drawn)
UGND on Bottom Layer "UGND_L02_P009" (solid, remove dead copper, pour order 9): 32.974,-11.222 32.974,15.71 24.778,15.71 24.778,8.852 24.778,4.407 19.99,-0.381 9.643,-0.381 9.643,-10.909
GND on Bottom Layer "GND" (solid, remove dead copper, pour order 13): -46.228,51.054 -47.244,50.038 -47.244,-38.1 32.131,-38.1 38.1,-32.131 40.132,-30.099 40.132,47.879 40.132,51.181 36.195,55.118 34.163,53.086 -43.688,53.086
UGND on Top Layer "Top Layer-No Net" (solid, pour order 11): 33.05,-11.176 33.05,15.748 24.765,15.748 24.765,8.89 24.765,3.048 21.336,-0.381 9.643,-0.381 9.643,-11.176
GND on Top Layer "GND" (solid, remove dead copper, pour order 15): -46.228,51.054 -47.244,50.038 -47.244,-38.1 32.131,-38.1 38.1,-32.131 40.132,-30.099 40.132,47.879 40.132,51.181 36.195,55.118 34.163,53.086 -43.688,53.086

## Keep-outs
Keep-Out Layer:
  the board outline again, w0.125

## Silkscreen, mask and mechanical layers (free items; w line width, h text height)
Bottom Overlay:
  text "CAN 1 / . / 5V / H / .  L / GND" at -30.607,26.924 h1.52
  text "BATT" at 10.541,24.892 h1.52
  text "GND" at -12.319,24.511 h1.52
  text "CANL1" at -12.319,22.225 h1.52
  text "BATT" at 10.668,21.971 h1.52
  text "CANH1" at -12.319,19.812 h1.52
  text "GND" at 10.541,19.812 h1.52
  text "SER2_RTS" at -7.62,17.399 h1.52
  text "GND" at 10.541,17.272 h1.52
  text "SER2_CTS" at -7.62,14.732 h1.52
  text "3DRID" at 10.541,14.732 h1.52
  text "SER2_RX" at -7.493,12.192 h1.52
  text "BUSID" at 10.541,12.192 h1.52
  text "SER2_TX" at -7.493,9.652 h1.52
  text "+5V" at 10.541,9.652 h1.52
  text "Serial 2 / 5V / TX / RX / CTS / RTS / GND" at -28.575,8.636 h1.52
  text "IO-USART1_RX" at -3.81,6.858 h1.52
  text "IO-PWM6" at 10.668,6.731 h1.52
  text "IO-PWM7" at 10.541,4.572 h1.52
  text "IO-USART1_TX" at -3.81,4.191 h1.52
  text "IO-PWM8" at 10.541,2.032 h1.52
  text "IO-SWDIO" at -7.62,1.778 h1.52
  text "GND" at 10.541,-0.508 h1.52
  text "IO-SWDCLK" at -7.747,-0.889 h1.52
  text "IO-SWDIO / GND / CLK / IO / RX / TX / 5V" at -29.337,-1.016 h1.52
  text "+5V USB" at 10.541,-3.048 h1.52
  text "SER5_TX" at -7.874,-3.429 h1.52
  text "D-" at 10.541,-5.588 h1.52
  text "SER5_RX" at -8.001,-5.969 h1.52
  text "FMU_SWDIO" at -8.128,-8.382 h1.52
  text "D+" at 10.668,-8.509 h1.52
  text "UGND" at 10.541,-10.668 h1.52
  text "FMU-SWDIO / GND / CLK / IO / RX / TX / 5V" at -28.575,-10.922 h1.52
  text "FMU_SWCLK" at -8.128,-11.049 h1.52
  text "-    +    S" at 29.972,-25.273 h1.52
Mechanical 1:
  the board outline again, w0.125
Mechanical 16:
  rectangle: -4.749,79.375 39.751,82.375
  region: 39.624,70.564 -4.876,70.564 -4.876,67.564 39.624,67.564
  lines w0.3: -32.529,62.337 -34.279,62.337 -34.279,88.337 -32.529,88.337 ; -7.076,72.714 41.924,72.714 41.924,76.964 -7.076,76.964 -7.076,72.714
  lines w0.635: -55.616,151.466 ccw(c-55.616,150.196) -56.886,150.196 -56.886,108.032 ccw(c-55.616,108.032) -55.616,106.762 60.97,106.762 ccw(c60.97,108.032) 62.24,108.032 62.24,150.196 ccw(c60.97,150.196) 60.97,151.466 -44.323,151.466 ; -55.335,101.551 ccw(c-55.335,100.281) -56.605,100.281 -56.605,58.117 ccw(c-55.335,58.117) -55.335,56.847 61.251,56.847 ccw(c61.251,58.117) 62.521,58.117 62.521,100.281 ccw(c61.251,100.281) 61.251,101.551 -23.703,101.551
  text "PCB" at -53.34,151.384 h2.54
  text "IPC Level" at -51.816,147.828 h1.27
  text "2" at -19.304,147.828 h1.27
  text "RoHS" at -51.816,145.288 h1.27
  text "Yes" at -19.304,145.288 h1.27
  text "Board Material" at -51.816,142.748 h1.27
  text "FR4" at -19.304,142.748 h1.27
  text "Board Thickness/Construction" at -51.816,140.208 h1.27
  text "0.062\"   +/-0.006\"" at -19.304,140.208 h1.27
  text "2" at -19.279,137.703 h1.27
  text "Number of Layers" at -51.816,137.668 h1.27
  text "Silkscreen" at -51.816,134.874 h1.27
  text "a. Permanent, non-conductive, white, epoxy ink. MUST NOT COVER EXPOSED PADS" at -19.304,134.874 h1.27
  text "b. Mfg's UL symbol, date code, and UL flammability rating shall be permanently marked" at -19.304,132.334 h1.27
  text "Surface Finish" at -51.816,130.048 h1.27
  text "Immersion Gold" at -19.304,129.794 h1.27
  text "Copper Thickness" at -51.816,127.508 h1.27
  text "TOP & BOTTOM: 1 oz." at -19.304,127.254 h1.27
  text "Mask Color" at -51.816,125.033 h1.27
  text "Black Mask." at -19.379,125.028 h1.27
  text "Manufacturer Markings" at -51.816,122.428 h1.27
  text "NIL" at -19.304,122.428 h1.27
  text "Hole Sizes" at -51.816,119.888 h1.27
  text "Dimensions specified in the gerber files are finished sizes, plated or unplated." at -19.304,119.888 h1.27
  text "Tolerance: +/- 3mils diameter max." at -19.304,117.348 h1.27
  text "UL Rating" at -51.816,114.808 h1.27
  text "94V-0" at -19.304,114.554 h1.27
  text "Registration" at -51.816,111.76 h1.27
  text "a. Layer-to-Layer registration must be +/- 0.003 of the true position." at -19.304,111.76 h1.27
  text "b. All holes shall be located within +/- 0.003\" of the true position" at -19.05,108.966 h1.27
  text "PCB STACK-UP" at -53.059,101.468 h2.54
  text "PCB Construction" at 2.721,96.337 h1.52
  text "0.0014\"  [1oz.]" at -29.337,80.264 h1.52
  text "Top Layer" at 45.212,80.264 h1.52
  text "FR4 Core" at 45.602,74.337 h1.52
  text "0.062\"+/-0.006\"" at -53.779,74.087 h1.52
  text "0.059\"+/- 0.003\"" at -29.779,74.087 h1.52
  text "0.0014\"  [1oz.]" at -29.464,68.326 h1.52
  text "Bottom Layer" at 44.069,68.326 h1.52
Drill Drawing:
  text ".LEGEND" at 91.507,-1.556 h1.52
  text "Drill Drawing. All are finished hole sizes, plated or unplated." at 91.507,-4.096 h1.52